# Altium PCB PCB1.PcbDoc
Units mm, origin at the board's own origin, x right, y up, seen from the top; angles counter-clockwise.
Board outline 74.68 x 42.27 mm, 2 copper layers (Top Layer, Bottom Layer); 49 components, 66 nets, 219 pads, 47 vias.
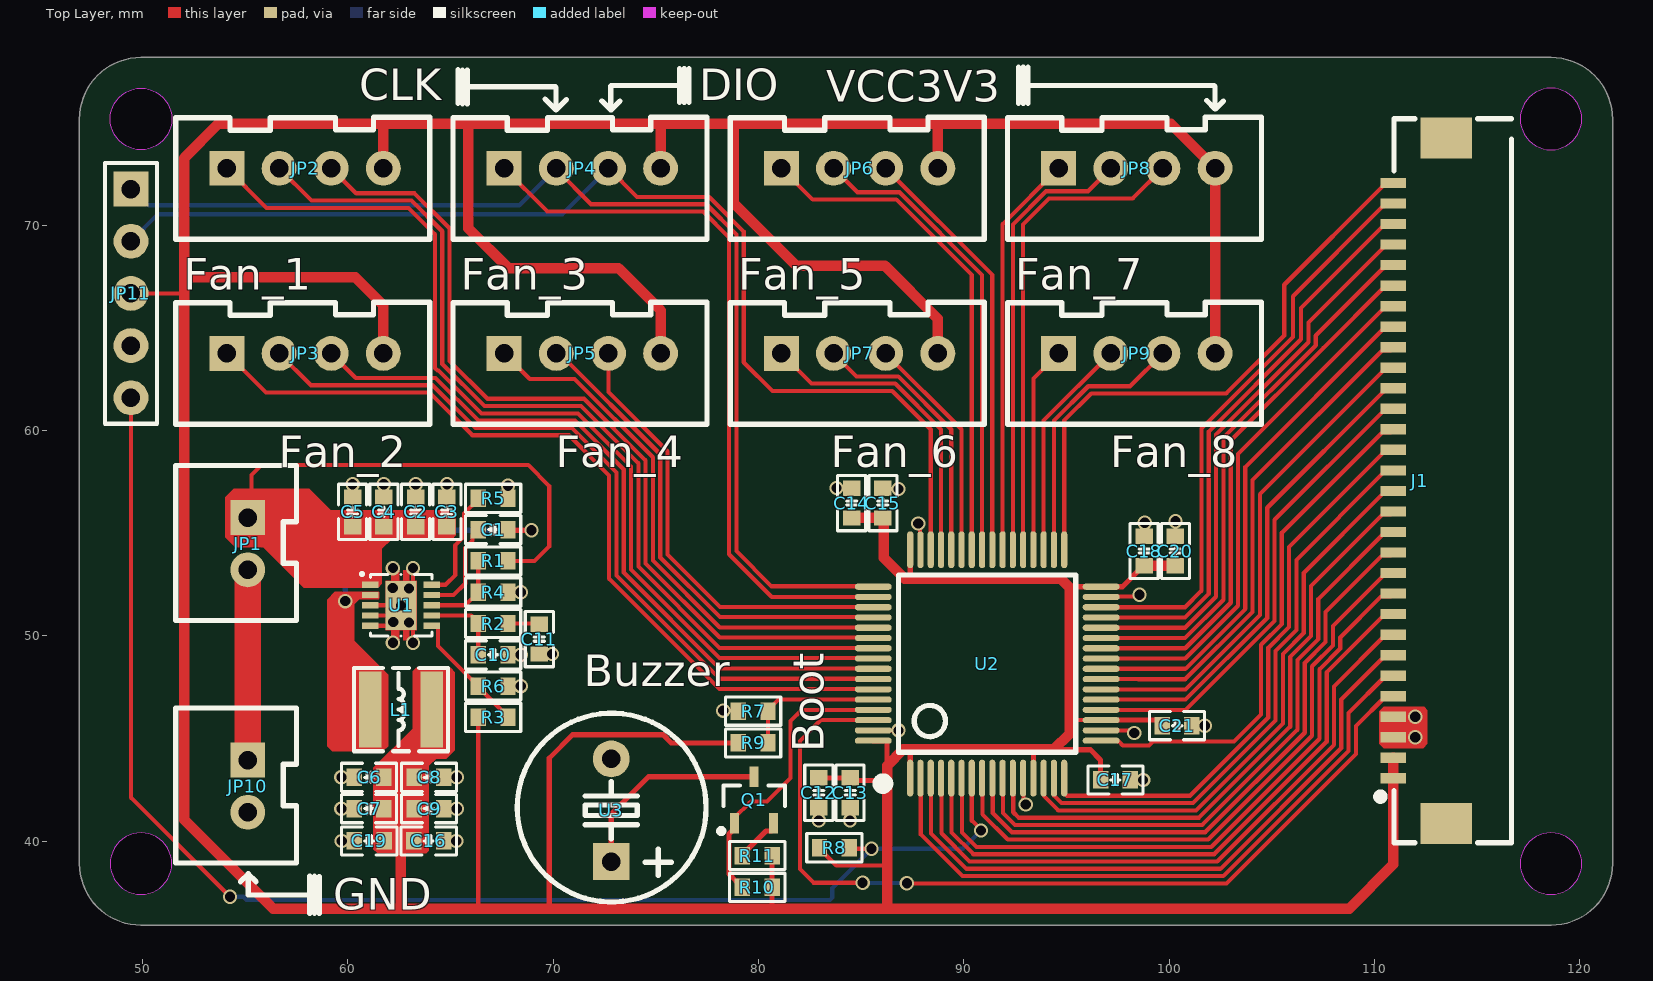
[diagram p0: Top Layer view]
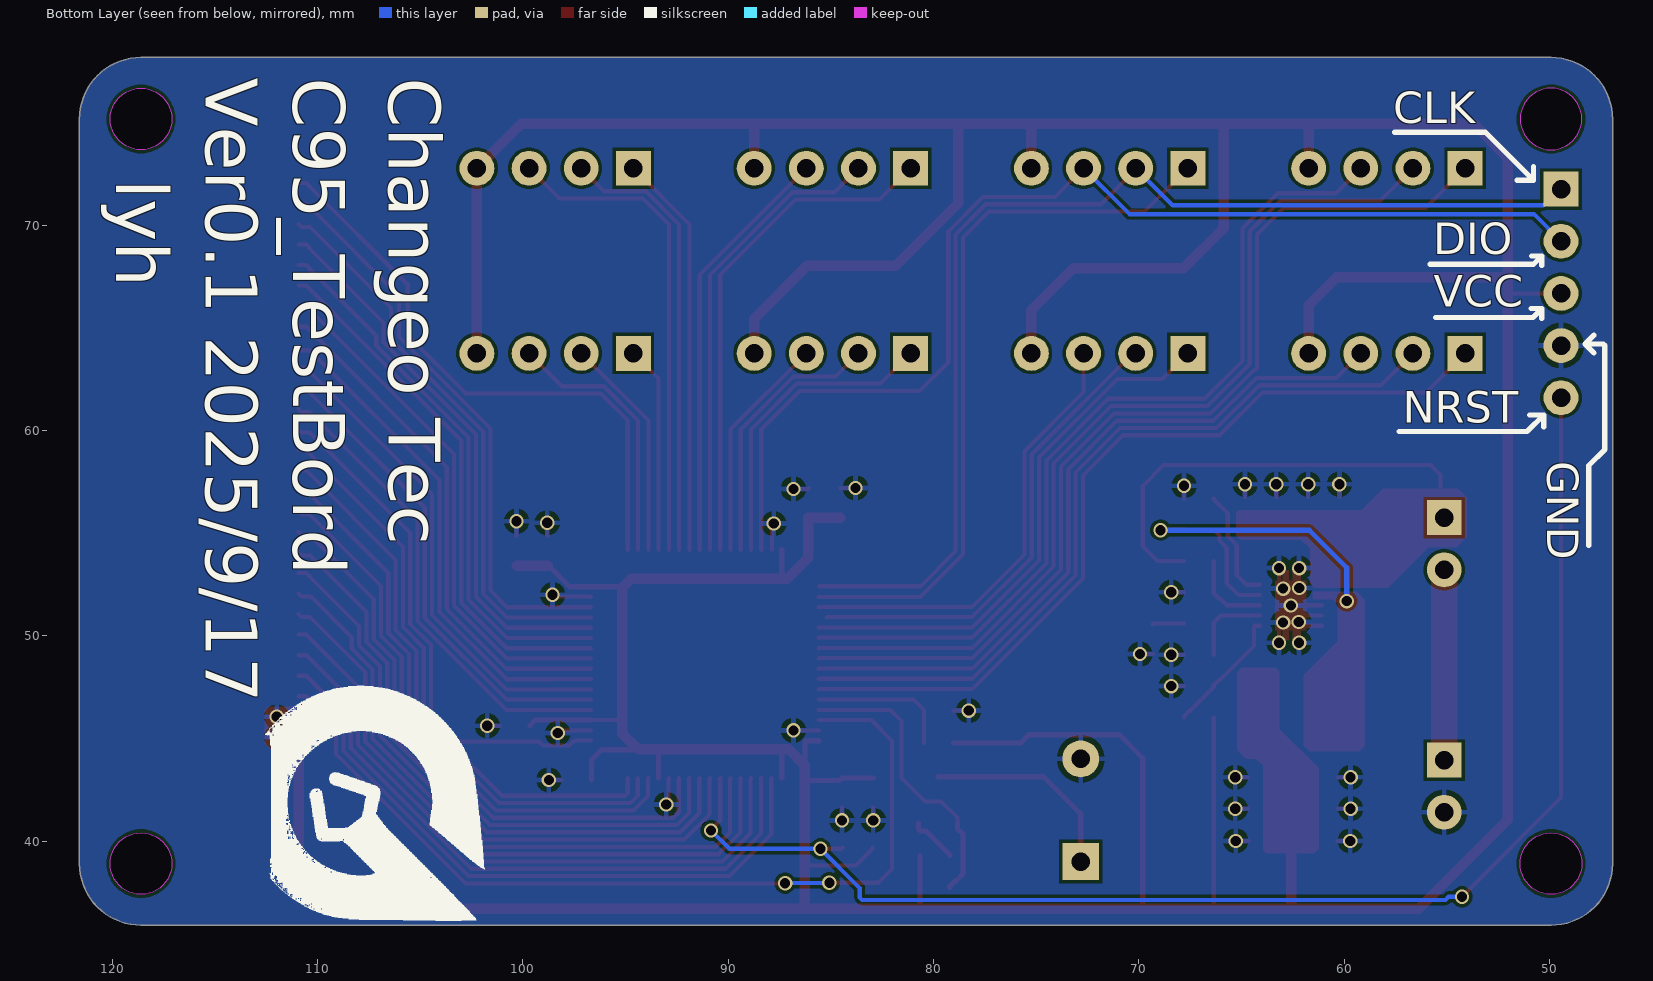
[diagram p1: Bottom Layer view, seen from below]

## Layer stack, top to bottom
Top Solder: solder mask 0.0102, Solder Resist, Dk 3.5
Top Layer: signal copper 0.0356
Dielectric 1: dielectric 0.32, FR-4, Dk 4.8
Bottom Layer: signal copper 0.0356
Bottom Solder: solder mask 0.0102, Solder Resist, Dk 3.5

## Board outline
46.918,38.902 46.918,75.171 cw(c49.918,75.171) 49.918,78.171 118.597,78.171 cw(c118.597,75.171) 121.597,75.171 121.597,38.902 cw(c118.597,38.902) 118.597,35.902 49.918,35.902 cw(c49.918,38.902)
cut-out: 48.418,38.902 ccw(c49.918,38.902) 49.918,37.402 ccw(c49.918,38.902) 51.418,38.902 ccw(c49.918,38.902) 49.918,40.402 ccw(c49.918,38.902)
cut-out: 117.097,38.902 ccw(c118.597,38.902) 118.597,37.402 ccw(c118.597,38.902) 120.097,38.902 ccw(c118.597,38.902) 118.597,40.402 ccw(c118.597,38.902)
cut-out: 117.097,75.171 ccw(c118.597,75.171) 118.597,73.671 ccw(c118.597,75.171) 120.097,75.171 ccw(c118.597,75.171) 118.597,76.671 ccw(c118.597,75.171)
cut-out: 49.918,73.671 cw(c49.918,75.171) 48.418,75.171 cw(c49.918,75.171) 49.918,76.671 cw(c49.918,75.171) 51.418,75.171 cw(c49.918,75.171)

## Design rules (kind name [scope] priority, off if disabled: settings)
Clearance [All] p1: gap=0.152 ignorepadtopadclearanceinfootprint=FALSE except(0: Arc-Hole Track-Hole SMDPad-Hole THPad-Hole Via-Hole Fill-Hole Poly-Hole Region-Hole Text-Text Text-Hole; 0.254: Via-Via)
PolygonConnect [All] p1: connectstyle=Relief reliefconductorwidth=0.254 reliefentries=4 polygonreliefangle="90 Angle" airgapwidth=0.254
RoutingVias [All] p1: holewidth=0.5 width=0.7 viastyle="Through Hole" minholewidth=0.4 minwidth=0.3 maxholewidth=0.5 maxwidth=1.27
SilkToSilkClearance [All] p1: silktosilkclearance=0
SilkToSolderMaskClearance [IsPad] p1: minsilkscreentomaskgap=0 clearancetoexposedcopper=TRUE
SolderMaskExpansion [All] p1: expansion=0.102 istentingtop=FALSE
Width [All] p1: maxlimit=2.54 minlimit=0.203 preferedwidth=0.254
28 further rules are at their usual default settings.

## Classes and differential pairs
component class PWR: C1 C2 C3 C4 C5 C6 C7 C8 C9 C10 C11 L1 R1 R2 R3 R4 R5 R6 U1
component class mcu: C12 C13 C14 C15 C16 C17 C18 C19 C20 C21 JP11 Q1 R7 R8 R9 R10 R11 U2 U3
component class Connector: J1 JP1 JP2 JP3 JP4 JP5 JP6 JP7 JP8 JP9 JP10

## Components (designator, comment, footprint, x,y, rotation, side; value= is the part's Value field where it differs from the comment)
C1 "100nF/25V" C0603_L 67.068,55.169 r180 top
C2 "10uF/25V" C0603_L 63.297,56.032 r270 top
C3 "10uF/25V" C0603_L 64.821,56.032 r270 top
C4 "1uF/25V" C0603_L 61.747,56.032 r270 top
C5 "3.3nF/25V" C0603_L 60.223,56.032 r270 top
C6 "22uF/16V" C0603_L 61.025,43.104 r0 top
C7 "22uF/16V" C0603_L 61.025,41.58 r0 top
C8 "22uF/16V" C0603_L 63.946,43.104 r180 top
C9 "22uF/16V" C0603_L 63.946,41.58 r180 top
C10 "120pF/25V" C0603_L 67.068,49.073 r180 top
C11 "6.8nF/25V" C0603_L 69.317,49.835 r90 top
C12 "1uF/10V" C0603_L 82.931,42.353 r270 top
C13 "1uF/10V" C0603_L 84.455,42.353 r270 top
C14 "1uF/10V" C0603_L 84.531,56.464 r270 top
C15 "1uF/10V" C0603_L 86.055,56.464 r270 top
C16 "1uF/10V" C0603_L 63.932,40.005 r180 top
C17 "10nF/10V" C0603_L 97.384,42.977 r180 top
C18 "1uF/10V" C0603_L 98.781,54.127 r270 top
C19 "1uF/10V" C0603_L 61.036,40.005 r180 top
C20 "1uF/10V" C0603_L 100.305,54.127 r270 top
C21 "10nF/10V" C0603_L 100.381,45.618 r0 top
J1 "Header 30X1" FPC1.0-2H-WS-30P 113.457,57.555 r90 top
JP1 "HDR-1X2" XH2.54-LI-2P 55.118,54.483 r270 top
JP2 "HDR-1X4" XH2.54-LI-4P 57.912,72.771 r0 top
JP3 "HDR-1X4" XH2.54-LI-4P 57.912,63.754 r0 top
JP4 "HDR-1X4" XH2.54-LI-4P 71.416,72.771 r0 top
JP5 "HDR-1X4" XH2.54-LI-4P 71.416,63.754 r0 top
JP6 "HDR-1X4" XH2.54-LI-4P 84.921,72.771 r0 top
JP7 "HDR-1X4" XH2.54-LI-4P 84.921,63.754 r0 top
JP8 "HDR-1X4" XH2.54-LI-4P 98.425,72.771 r0 top
JP9 "HDR-1X4" XH2.54-LI-4P 98.425,63.754 r0 top
JP10 "HDR-1X2" XH2.54-LI-2P 55.118,42.672 r270 top
JP11 "HDR-1X5" HDR2.54-LI-5P 49.428,66.675 r270 top
L1 "5.6uH" NR4020 62.586,46.406 r0 top
Q1 "AO3401" SOT23-3L 79.781,42.012 r0 top
R1 "10K 1%" R0603_L 67.068,53.645 r180 top
R2 "4.42K 1%" R0603_L 67.068,50.597 r0 top
R3 "100K 1%" R0603_L 67.068,46.025 r0 top
R4 "10K 1%" R0603_L 67.068,52.121 r0 top
R5 "95.3K 1%" R0603_L 67.068,56.693 r0 top
R6 "32K 1%" R0603_L 67.068,47.549 r0 top
R7 "10K 1%" R0603_L 79.731,46.33 r180 top
R8 "10K 1%" R0603_L 83.693,39.675 r180 top
R9 "10K 1%" R0603_L 79.731,44.78 r180 top
R10 "10K 1%" R0603_L 79.934,37.744 r0 top
R11 "0R 1%" R0603_L 79.934,39.294 r0 top
U1 "TPS54335A-QFN" VSON-10_L3.0-W3.0-P0.50-TL-EP 62.586,51.486 r0 top
U2 "STM32F103R6TX_LQFP64" "LQFP64 10x10_N" 91.135,48.641 r0 top locked
U3 "Buzzer-A" "BEEP 5x9x5.5" 72.822,41.504 r0 top

## Footprints (in the part's own frame and the unit in brackets; to place one, negate y for a bottom-side part, rotate by r counter-clockwise, add the part's x,y. Pads: shape width x height; smd on the part's side, far side on the other; paste and mask are expansions set on the pad)
"BEEP 5x9x5.5" [mm] "5*9*5.5mm(脚距,直径,高度)"
  rect 1.8x1.8 hole 0.9: 1(0,-2.5)
  round 1.8 hole 0.9: 2(0,2.5)
  silkscreen extent -4.58,-4.47 4.62,4.72, body extent -4.5,-4.5 4.5,4.5, height 5.45
C0603_L [mm] "贴片MLCC电容"
  rect 0.75x0.85 smd: 1(-0.725,0) 2(0.725,0)
  silkscreen extent -1.35,-0.69 1.35,0.69, body extent -0.8,-0.4 0.8,0.4, height 0.8
FPC1.0-2H-WS-30P [mm] "翻盖FPC，脚距1mm，不含脚（长34.9mm，宽5.2mm，高1.96mm）"
  rect 2x2.5 smd: 0(-16.69,-0.04) 0(16.69,-0.04)
  rect 0.5x1.25 smd: 1(-14.5,2.535) 2(-13.5,2.535) 3(-12.5,2.535) 4(-11.5,2.535) 5(-10.5,2.535) 6(-9.5,2.535) 7(-8.5,2.535) 8(-7.5,2.535) 9(-6.5,2.535) 10(-5.5,2.535) 11(-4.5,2.535) 12(-3.5,2.535) 13(-2.5,2.535) 14(-1.5,2.535) 15(-0.5,2.535) 16(0.5,2.535) 17(1.5,2.535) 18(2.5,2.535) 19(3.5,2.535) 20(4.5,2.535) 21(5.5,2.535) 22(6.5,2.535) 23(7.5,2.535) 24(8.5,2.535) 25(9.5,2.535) 26(10.5,2.535) 27(11.5,2.535) 28(12.5,2.535) 29(13.5,2.535) 30(14.5,2.535)
  silkscreen extent -17.64,-3.21 17.63,3.27, body extent -17.45,-3.19 17.45,2.81, height 2
HDR2.54-LI-5P [mm] "排针，5脚"
  rect 1.7x1.7 hole 0.9: 1(-5.08,0)
  round 1.7 hole 0.9: 2(-2.54,0) 3(0,0) 4(2.54,0) 5(5.08,0)
  silkscreen extent -6.35,-1.27 6.35,1.27, body extent -6.35,-1.27 6.35,1.27, height 8.5
"LQFP64 10x10_N" [mm] "64脚，体宽10x10mm，脚距0.5mm"
  oval 0.3x1.8 smd: 1(-3.75,-5.575) 2(-3.25,-5.575) 3(-2.75,-5.575) 4(-2.25,-5.575) 5(-1.75,-5.575) 6(-1.25,-5.575) 7(-0.75,-5.575) 8(-0.25,-5.575) 9(0.25,-5.575) 10(0.75,-5.575) 11(1.25,-5.575) 12(1.75,-5.575) 13(2.25,-5.575) 14(2.75,-5.575) 15(3.25,-5.575) 16(3.75,-5.575) 33(3.75,5.55) 34(3.25,5.55) 35(2.75,5.55) 36(2.25,5.55) 37(1.75,5.55) 38(1.25,5.55) 39(0.75,5.55) 40(0.25,5.55) 41(-0.25,5.55) 42(-0.75,5.55) 43(-1.25,5.55) 44(-1.75,5.55) 45(-2.25,5.55) 46(-2.75,5.55) 47(-3.25,5.55) 48(-3.75,5.55)
  oval 1.8x0.3 smd: 17(5.55,-3.75) 18(5.55,-3.25) 19(5.55,-2.75) 20(5.55,-2.25) 21(5.55,-1.75) 22(5.55,-1.25) 23(5.55,-0.75) 24(5.55,-0.25) 25(5.55,0.25) 26(5.55,0.75) 27(5.55,1.25) 28(5.55,1.75) 29(5.55,2.25) 30(5.55,2.75) 31(5.55,3.25) 32(5.55,3.75) 49(-5.55,3.75) 50(-5.55,3.25) 51(-5.55,2.75) 52(-5.55,2.25) 53(-5.55,1.75) 54(-5.55,1.25) 55(-5.55,0.75) 56(-5.55,0.25) 57(-5.55,-0.25) 58(-5.55,-0.75) 59(-5.55,-1.25) 60(-5.55,-1.75) 61(-5.55,-2.25) 62(-5.55,-2.75) 63(-5.55,-3.25) 64(-5.55,-3.75)
  silkscreen extent -5.33,-6.09 4.32,4.32, body extent -6,-6 6,6, height 1.45
NR4020 [mm] "4.0mm*4.0mm*2.0mm(长*宽*高）"
  rect 1.1x3.7 smd: 1(-1.5,0) 2(1.5,0)
  silkscreen extent -2.29,-2.03 2.29,2.03, body extent -2,-2 2,2, height 2.1
R0603_L [mm] "1/10W贴片电阻"
  rect 0.75x0.85 smd: 1(-0.725,0) 2(0.725,0)
  silkscreen extent -1.35,-0.69 1.35,0.69, body extent -0.8,-0.4 0.8,0.4, height 0.4
SOT23-3L [mm] "3x1.3x1mm(长宽高)"
  rect 0.45x1 smd: 1(-0.95,-1.143) 2(0.95,-1.143) 3(0,1.125)
  silkscreen extent -1.72,-1.65 1.5,0.7, body extent -1.5,-1.2 1.5,1.2, height 1.05
VSON-10_L3.0-W3.0-P0.50-TL-EP [mm]
  rect 0.8x0.3 smd: 1(-1.5,1) 2(-1.5,0.5) 3(-1.5,0) 4(-1.5,-0.5) 5(-1.5,-1) 6(1.5,-1) 7(1.5,-0.5) 8(1.5,0) 9(1.5,0.5) 10(1.5,1)
  rect 1.52x2.4 smd: 11(0.002,-0.009)
  Top Layer region: -0.758,1.191 -0.398,1.191 -0.398,1.706 -0.098,1.706 -0.098,1.191 0.102,1.191 0.102,1.706 0.402,1.706 0.402,1.191 0.761,1.191 0.761,-1.209 0.402,-1.209 0.402,-1.714 0.102,-1.714 0.102,-1.209 -0.098,-1.209 -0.098,-1.714 -0.398,-1.714 -0.398,-1.209 -0.759,-1.209 -0.759,0.886 -0.758,0.886 -0.758,1.191
  silkscreen extent -1.98,-1.5 1.5,1.6, body extent -1.51,-1.52 1.51,1.5, height 0.61
XH2.54-LI-2P [mm] "接插件，2P"
  rect 1.7x1.7 hole 0.9: 1(-1.27,0)
  round 1.7 hole 0.9: 2(1.27,0)
  silkscreen extent -3.81,-3.51 3.74,2.37, body extent -3.77,-3.3 3.77,2.4, height 7.05
XH2.54-LI-4P [mm] "接插件，4P"
  rect 1.7x1.7 hole 0.9: 1(-3.81,0)
  round 1.7 hole 0.9: 2(-1.27,0) 3(1.27,0) 4(3.81,0)
  silkscreen extent -6.3,-3.45 6.07,2.49, body extent -6.31,-3.3 6.31,2.4, height 7.03

## Part data
C1 C2 C3 C4 C5 C6 C7 C8 C9 C10 C11 C12 C13 C14 C15 C16 C17 C18 C19 C20 C21: library part C, "无极性贴片电容", BOM名称=无极性贴片电容, 学习资源=www.ooocke.com, 材质=X7R, 版权归属=源创客
JP1 JP10: library part "Header 2", "2P接插件", BOM名称=2P接插件, 学习资源=www.ooocke.com, 版权归属=源创客
JP2 JP3 JP4 JP5 JP6 JP7 JP8 JP9: library part "Header 4", "4P接插件", BOM名称=4P接插件, 学习资源=www.ooocke.com, 版权归属=源创客
JP11: library part "Header 5", "5P接插件", BOM名称=5P接插件, 学习资源=www.ooocke.com, 版权归属=源创客
L1: library part L, "小功率贴片电感", BOM名称=小功率贴片电感, 学习资源=www.ooocke.com, 版权归属=源创客
Q1: "P沟道 30V/4.2A", BOM名称=场效应管, 学习资源=www.ooocke.com, 描述="P沟道 30V/4.2A", 版权归属=源创客
R1 R2 R3 R4 R5 R6 R7 R8 R9 R10 R11: library part R, "贴片电阻", BOM名称=贴片电阻, 学习资源=www.ooocke.com, 版权归属=源创客
U1: "BUCK"
U3: "有源蜂鸣器"

## Via types
v1: diameter 0.7, hole 0.5, Top Layer to Bottom Layer, 47 vias

## Nets (pads, with @x,y where several pads share a name; then routed paths per layer and width w, separated by ;. In a path a pad name is that pad's centre, name@x,y a point inside that pad or via, vN(x,y) a via of type N, cw(c..) or ccw(c..) an arc to the next point about the centre after c; other vN are vias at no path point)
BEEP: Q1.1 R10.1 U2.61 | length 14.4
  Top Layer w0.203: Q1.1 78.831,41.144 79.572,41.885 79.578,41.885 79.629,41.935 80.416,41.935 81.559,43.078 81.559,45.847 82.103,46.391 U2.61
  Top Layer w0.254: Q1.1 78.831,40.594 78.733,40.496 78.703,40.496 78.554,40.347 78.554,38.399 78.911,38.042 78.961,38.042 79.209,37.794 R10.1
BOOT: R7.1 R9.1 U2.60 | length 6.9
  Top Layer w0.203: R9.1 R7.1 80.456,46.38 80.967,46.891 U2.60
Button: J1.6 U2.2 | length 31.7
  Top Layer w0.203: U2.2 87.902,43.049 87.902,40.317 89.925,38.294 102.637,38.294 108.737,44.394 108.737,46.246 110.547,48.055 J1.6
GND: C2.1 C3.1 C4.1 C5.1 C6.1 C7.1 C8.1 C9.1 C10.1 C11.1 C12.2 C13.2 C14.1 C15.1 C16.1 C17.1 C18.1 C19.2 C20.1 C21.2 J1.3 J1.4 JP10.2 JP11.4 R4.2 R5.2 R6.2 R7.2 U1.3 U1.4 U1.5 U1.11 U2.12 U2.18 U2.31 U2.47 U2.63 U3.2 | length 29.4
  Top Layer w0.203: v1(59.678,41.58) C7.1 ; v1(59.678,43.104) C6.1 ; v1(59.69,40.005) C19.2 ; C5.1 v1(60.223,57.379) ; U1.5 62.347,50.486 U1.11@62.382,50.521 ; U1.4 62.298,50.986 U1.11@62.306,50.978 ; U1.3 62.51,51.486 U1.11@62.535,51.46 ; C4.1 v1(61.747,57.379) ; v1(62.187,49.656) U1.11@62.187,50.277 ; U1.11@62.187,52.677 v1(62.187,53.298) ; v1(63.167,49.656) U1.11@63.167,50.277 ; U1.11@63.167,52.677 v1(63.167,53.298) ; C2.1 v1(63.297,57.379) ; C16.1 v1(65.278,40.005) ; C9.1 v1(65.292,41.58) ; C8.1 v1(65.292,43.104) ; C3.1 v1(64.821,57.379) ; R6.2 v1(68.414,47.549) ; C10.1 v1(68.414,49.073) ; R4.2 v1(68.414,52.121) ; R5.2 v1(67.793,57.314) ; C11.1 v1(69.938,49.11) ; v1(78.283,46.355) 78.98,46.355 R7.2 ; v1(82.931,41.007) C12.2 ; v1(83.795,57.201) 84.52,57.201 C14.1 ; v1(84.455,41.007) C13.2 ; U2.63 v1(86.817,45.39) ; C15.1 86.094,57.15 v1(86.817,57.15) ; v1(87.771,55.467) 87.771,55.333 87.867,55.237 87.867,54.21 U2.47 ; U2.12 92.904,43.047 92.904,42.022 93.008,41.918 v1(93.008,41.783) ; U2.18 98.034,45.391 98.164,45.262 v1(98.298,45.262) ; U2.31 96.704,51.91 98.467,51.91 v1(98.552,51.995) ; C17.1 v1(98.73,42.977) ; C18.1 98.806,54.878 v1(98.806,55.499) ; C20.1 v1(100.305,55.575) ; C21.2 v1(101.727,45.618)
  other v1: 111.989,45.06 111.989,46.05 62.967,50.648 62.205,50.673 62.587,51.477 62.967,52.299 62.179,52.324
NetC1_1: C1.1 L1.1 U1.2 | length 13.9
  Top Layer w0.254: v1(59.868,51.689) 59.998,51.689 60.294,51.986 U1.2 ; C1.1 67.818,55.143 v1(68.936,55.143)
  Bottom Layer w0.254: v1(59.868,51.689) 59.868,53.315 61.697,55.143 v1(68.936,55.143)
NetC1_2: C1.2 U1.9 | length 4.7
  Top Layer w0.203: U1.9 65.143,51.986 65.71,52.553 65.71,54.275 66.069,54.634 66.069,54.895 C1.2
NetC10_2: C10.2 R2.1 U1.7 | length 4
  Top Layer w0.203: U1.7 66.004,50.986 66.343,50.647 R2.1 C10.2
NetC11_2: C11.2 R2.2 | length 1.5
  Top Layer w0.203: R2.2 69.28,50.597 C11.2
NetQ1_2: Q1.2 R11.1 | length 2.4
  Top Layer w0.254: R11.1 79.209,39.344 80.361,40.496 80.633,40.496 80.731,40.594 Q1.2
NetQ1_3: Q1.3 U3.1 | length 10
  Top Layer w0.254: U3.1 72.822,41.326 74.633,43.137 Q1.3
NetR1_2: R1.2 R4.1 U1.8 | length 4.1
  Top Layer w0.203: U1.8 65.707,51.486 66.019,51.797 66.069,51.797 66.343,52.071 R4.1 R1.2
NetR5_1: R5.1 U1.10 | length 5.5
  Top Layer w0.203: U1.10 64.754,52.486 65.227,52.959 65.227,54.413 65.659,54.845 65.659,55.959 66.343,56.643 R5.1
NRST: JP11.5 R8.1 U2.7 | length 68.5
  Top Layer w0.203: JP11.5 49.428,42.113 v1(54.254,37.287) ; R8.1 84.469,39.624 v1(85.502,39.624) ; U2.7@90.404,43.047 U2.7 90.385,40.994 90.83,40.549 v1(90.83,40.513)
  Bottom Layer w0.203: v1(54.254,37.287) 54.911,37.287 55.064,37.135 83.472,37.135 83.591,37.254 83.591,37.713 v1(85.502,39.624) 89.941,39.624 v1(90.83,40.513)
Part1_LED_U: J1.7 U2.3 | length 31.6
  Top Layer w0.203: U2.3 88.404,43.047 88.404,40.374 90.129,38.649 102.49,38.649 108.382,44.541 108.382,46.89 110.547,49.055 J1.7
Part1_LED_V: J1.8 U2.4 | length 31.5
  Top Layer w0.203: U2.4 88.904,43.047 88.904,40.382 90.281,39.005 102.343,39.005 108.026,44.689 108.026,47.534 110.547,50.055 J1.8
Part1_LED_W: J1.9 U2.5 | length 31.4
  Top Layer w0.203: U2.5 89.404,43.047 89.404,40.416 90.459,39.361 102.195,39.361 107.671,44.836 107.671,48.219 110.358,50.907 110.773,50.907 J1.9
Part1_U: JP2.1 U2.56 | length 48.1
  Top Layer w0.203: JP2.1 56.032,70.841 62.951,70.841 64.237,69.555 64.237,63.035 64.356,62.916 64.414,62.916 66.497,60.833 71.206,60.833 73.787,58.252 73.787,53.223 78.101,48.91 85.567,48.91 U2.56
Part1_V: JP2.2 U2.55 | length 45.4
  Top Layer w0.203: JP2.2 58.217,71.196 63.099,71.196 64.592,69.703 64.592,63.241 66.644,61.189 71.354,61.189 74.143,58.4 74.143,53.37 78.103,49.41 85.567,49.41 U2.55
Part1_W: JP2.3 U2.54 | length 42.6
  Top Layer w0.203: JP2.3 60.401,71.552 63.246,71.552 64.948,69.85 64.948,63.388 66.792,61.544 71.501,61.544 74.498,58.547 74.498,53.518 78.106,49.91 85.567,49.91 U2.54
Part2_LED_U: J1.10 U2.6 | length 31.4
  Top Layer w0.203: U2.6 89.904,43.047 89.904,40.424 90.611,39.716 102.048,39.716 107.315,44.983 107.315,48.367 108.331,49.383 108.331,49.911 110.327,51.907 110.773,51.907 J1.10
Part2_LED_V: J1.11 U2.8 | length 30.2
  Top Layer w0.203: U2.8 90.904,43.047 90.904,41.303 92.135,40.072 101.901,40.072 106.959,45.131 106.959,48.514 107.975,49.53 107.975,50.47 110.398,52.893 110.398,52.907 110.547,53.055 J1.11
Part2_LED_W: J1.12 U2.9 | length 30.1
  Top Layer w0.203: U2.9 91.404,43.047 91.404,41.362 92.338,40.427 101.753,40.427 106.604,45.278 106.604,48.677 107.62,49.693 107.62,51.156 110.371,53.907 110.773,53.907 J1.12
Part2_U: JP3.1 U2.59 | length 41.2
  Top Layer w0.203: JP3.1 56.007,61.849 63.973,61.849 66.055,59.766 70.764,59.766 72.72,57.81 72.72,52.781 78.092,47.41 85.567,47.41 U2.59
Part2_V: JP3.2 U2.58 | length 38.5
  Top Layer w0.203: JP3.2 58.191,62.205 64.12,62.205 66.203,60.122 70.912,60.122 73.076,57.958 73.076,52.928 78.095,47.91 85.567,47.91 U2.58
Part2_W: JP3.3 U2.57 | length 35.7
  Top Layer w0.203: JP3.3 60.376,62.56 64.267,62.56 66.35,60.477 71.059,60.477 73.431,58.105 73.431,53.076 78.098,48.41 85.567,48.41 U2.57
Part3_LED_U: J1.13 U2.10 | length 30
  Top Layer w0.203: U2.10 91.904,43.047 91.904,41.37 92.491,40.783 101.606,40.783 106.248,45.425 106.248,48.824 107.264,49.84 107.264,51.791 110.38,54.907 110.773,54.907 J1.13
Part3_LED_V: J1.14 U2.11 | length 29.9
  Top Layer w0.203: U2.11 92.404,43.047 92.404,41.403 92.669,41.139 101.459,41.139 105.893,45.572 105.893,48.971 106.909,49.987 106.909,52.426 110.39,55.907 110.773,55.907 J1.14
Part3_LED_W: J1.15 U2.14 | length 28.3
  Top Layer w0.203: U2.14 93.904,43.047 93.904,42.189 94.599,41.494 101.312,41.494 105.537,45.72 105.537,49.119 106.553,50.135 106.553,53.061 110.398,56.906 110.547,57.055 J1.15
Part3_U: JP4.1 U2.50 | length 35.7
  Top Layer w0.203: JP4.1 69.715,70.663 77.302,70.663 78.562,69.403 78.562,53.97 80.641,51.891 U2.50
Part3_V: JP4.2 JP11.1 U2.49 | length 54.7
  Top Layer w0.203: JP4.2 70.146,72.708 71.836,71.018 77.45,71.018 78.918,69.55 78.918,54.127 80.636,52.41 U2.49@85.567,52.41
  Bottom Layer w0.203: JP11.1 50.177,71.007 50.257,71.007 50.296,70.968 68.343,70.968 JP4.2
Part3_W: JP4.3 JP11.2 U2.46 | length 55.3
  Top Layer w0.203: JP4.3 74.083,71.374 77.597,71.374 79.273,69.698 79.273,63.322 80.67,61.925 86.511,61.925 88.385,60.051 U2.46
  Bottom Layer w0.203: JP11.2 50.749,70.536 70.451,70.536 JP4.3
Part4_LED_U: J1.16 U2.15 | length 28.2
  Top Layer w0.203: U2.15 94.404,43.047 94.404,42.203 94.756,41.85 101.164,41.85 105.181,45.867 105.181,49.266 106.197,50.282 106.197,53.696 110.398,57.897 110.398,57.907 110.547,58.055 J1.16
Part4_LED_V: J1.17 U2.16 | length 28.1
  Top Layer w0.203: U2.16 94.885,42.342 95.022,42.205 101.017,42.205 104.826,46.014 104.826,49.413 105.842,50.429 105.842,54.331 110.398,58.887 110.398,58.907 110.547,59.055 J1.17
Part4_LED_W: J1.18 U2.17 | length 25.3
  Top Layer w0.203: U2.17 97.461,44.891 97.51,44.843 97.552,44.843 97.737,44.658 99.014,44.658 99.202,44.846 103.155,44.846 104.47,46.162 104.47,49.561 105.486,50.577 105.486,55.016 110.376,59.907 110.773,59.907 J1.18
Part4_U: JP5.1 U2.53 | length 26.5
  Top Layer w0.203: JP5.1 68.851,62.509 71.039,62.509 74.854,58.694 74.854,53.665 78.109,50.41 85.567,50.41 U2.53
Part4_V: JP5.2 U2.52 | length 23.3
  Top Layer w0.203: JP5.2 70.297,63.754 75.209,58.841 75.209,53.812 78.112,50.91 85.179,50.91 U2.52@85.197,50.891
Part4_W: JP5.3 U2.51 | length 22.1
  Top Layer w0.203: JP5.3 72.686,61.867 75.565,58.989 75.565,53.96 78.115,51.41 85.567,51.41 U2.51
Part5_LED_U: J1.19 U2.20 | length 23.2
  Top Layer w0.203: U2.20 100.798,46.391 105.131,50.724 105.131,55.651 110.386,60.907 110.773,60.907 J1.19
Part5_LED_V: J1.20 U2.21 | length 23.7
  Top Layer w0.203: U2.21 100.795,46.891 104.775,50.871 104.775,56.236 110.398,61.859 110.398,61.907 110.547,62.055 J1.20
Part5_LED_W: J1.21 U2.22 | length 24.2
  Top Layer w0.203: U2.22 100.792,47.391 104.419,51.018 104.419,56.896 110.398,62.875 110.398,62.907 110.547,63.055 J1.21
Part5_U: JP6.1 U2.42 | length 24.8
  Top Layer w0.203: JP6.1 82.635,71.247 86.709,71.247 90.385,67.571 U2.42
Part5_V: JP6.2 U2.41 | length 22.8
  Top Layer w0.203: JP6.2 84.819,71.603 86.856,71.603 90.885,67.574 U2.41
Part5_W: JP6.3 U2.40 | length 20.7
  Top Layer w0.203: JP6.3 91.385,67.576 U2.40
Part6_LED_U: J1.22 U2.23 | length 24.7
  Top Layer w0.203: U2.23 98.501,47.891 98.506,47.886 100.784,47.886 104.064,51.166 104.064,57.582 110.389,63.907 110.773,63.907 J1.22
Part6_LED_V: J1.23 U2.24 | length 25.2
  Top Layer w0.203: U2.24 100.786,48.391 103.708,51.313 103.708,58.216 110.547,65.055 J1.23
Part6_LED_W: J1.24 U2.25 | length 25.7
  Top Layer w0.203: U2.25 100.783,48.891 103.353,51.46 103.353,58.852 110.398,65.898 110.398,65.907 110.547,66.055 J1.24
Part6_U: JP7.1 U2.45 | length 15.2
  Top Layer w0.203: JP7.1 82.584,62.281 86.658,62.281 88.885,60.054 U2.45
Part6_V: JP7.2 U2.44 | length 13.1
  Top Layer w0.203: JP7.2 84.768,62.636 86.805,62.636 89.385,60.057 U2.44
Part6_W: JP7.3 U2.43 | length 11.1
  Top Layer w0.203: JP7.3 89.885,60.059 U2.43
Part7_LED_U: J1.25 U2.26 | length 26.2
  Top Layer w0.203: U2.26 100.78,49.391 102.997,51.608 102.997,59.505 107.493,64.001 110.547,67.055 J1.25
Part7_LED_V: J1.26 U2.27 | length 26.7
  Top Layer w0.203: U2.27 100.778,49.891 102.641,51.755 102.641,59.652 107.137,64.148 107.137,64.618 110.398,67.879 110.398,67.907 110.547,68.055 J1.26
Part7_LED_W: J1.27 U2.28 | length 27.2
  Top Layer w0.203: U2.28 100.775,50.391 102.286,51.902 102.286,59.8 106.782,64.296 106.782,65.253 110.398,68.869 110.398,68.907 110.547,69.055 J1.27
Part7_U: JP8.1 U2.39 | length 19.7
  Top Layer w0.203: U2.39 91.885,70.041 JP8.1
Part7_V: JP8.2 U2.38 | length 21.7
  Top Layer w0.203: U2.38 92.385,70.038 94,71.653 96.037,71.653 JP8.2
Part7_W: JP8.3 U2.37 | length 23.8
  Top Layer w0.203: U2.37 92.885,70.035 94.148,71.298 98.222,71.298 JP8.3
Part8_LED_U: J1.28 U2.29 | length 27.7
  Top Layer w0.203: U2.29 100.772,50.891 101.93,52.049 101.93,59.947 106.426,64.443 106.426,65.964 110.369,69.907 110.773,69.907 J1.28
Part8_LED_V: J1.29 U2.30 | length 28.2
  Top Layer w0.203: U2.30 100.769,51.391 101.575,52.197 101.575,60.094 101.723,60.243 106.035,64.555 106.035,66.538 110.398,70.901 110.398,70.907 110.547,71.055 J1.29
Part8_LED_W: J1.30 U2.33 | length 28.6
  Top Layer w0.203: U2.33 94.885,60.478 96.205,61.798 102.776,61.798 105.603,64.626 105.603,67.097 110.398,71.892 110.398,71.907 110.547,72.055 J1.30
Part8_U: JP9.1 U2.36 | length 10.1
  Top Layer w0.203: U2.36 93.385,62.524 JP9.1
Part8_V: JP9.2 U2.35 | length 10.9
  Top Layer w0.203: U2.35 93.885,60.484 JP9.2
Part8_W: JP9.3 U2.34 | length 13
  Top Layer w0.203: U2.34 94.385,60.481 96.058,62.154 98.095,62.154 JP9.3
Status: J1.5 U2.62 | length 44
  Top Layer w0.203: v1(85.065,37.973) 82.677,37.973 82.017,38.633 82.017,44.882 83.026,45.891 U2.62 ; v1(87.224,37.948) 87.233,37.938 102.784,37.938 109.093,44.247 109.093,45.601 110.547,47.055 J1.5
  Bottom Layer w0.203: v1(85.065,37.973) 85.077,37.96 87.211,37.96 v1(87.224,37.948)
VCC3V3: C6.2 C7.2 C8.2 C9.2 C12.1 C13.1 C14.2 C15.2 C16.2 C17.2 C18.2 C19.1 C20.2 C21.1 J1.1 J1.2 JP2.4 JP3.4 JP4.4 JP5.4 JP6.4 JP7.4 JP8.4 JP9.4 JP11.3 L1.2 R3.1 R8.2 R9.2 R10.2 R11.2 U2.1 U2.13 U2.19 U2.32 U2.48 U2.64 | length 314.2
  Top Layer w0.203: JP11.3 52.019,66.675 ; 66.343,36.703 R3.1 ; 75.246,36.717 75.26,36.703 ; 79.959,36.703 80.049,36.793 ; R8.2 82.968,39.625 83.782,38.811 86.258,38.811 ; JP7.4@88.468,63.678 88.544,63.754 JP7.4 ; 95.148,45.974 95.231,45.891 U2.19
  Top Layer w0.254: 69.647,36.703 69.799,36.855 69.799,44.038 70.944,45.183 75.344,45.183 75.747,44.78 R9.2 ; R10.2 80.659,36.791 80.747,36.703 ; R10.2@80.659,37.832 R11.2 ; C12.1 C13.1 84.589,42.945 86.258,42.945 ; U2.64 86.237,44.891 86.258,44.87 86.258,43.678 ; 87.122,52.781 87.385,53.044 U2.48 ; 87.325,44.475 87.385,44.415 U2.1 ; U2.13 93.394,43.074 93.394,44.448 93.421,44.475 ; 94.386,44.45 96.164,44.45 96.659,43.956 C17.2 ; 95.148,52.349 95.19,52.391 U2.32 97.719,52.391 98.731,53.402 C18.2 ; U2.19 99.408,45.891 99.656,45.643 C21.1
  Top Layer w0.508: JP3.4 61.722,66.091 60.35,67.462 52.019,67.462 ; JP2.4 61.722,74.93 ; 62.56,40.005 62.56,36.703 ; JP5.4 75.226,65.845 73.177,67.894 67.818,67.894 65.862,69.85 65.862,74.93 ; JP4.4 75.226,74.896 75.26,74.93 ; C14.2 C15.2 ; C15.2@86.106,55.739 86.106,53.797 87.122,52.781 94.717,52.781 95.148,52.349 95.148,45.974 95.148,45.237 94.386,44.475 93.421,44.475 87.325,44.475 87.056,44.475 86.258,43.678 86.258,42.945 86.258,38.811 86.258,36.703 ; JP7.4 88.731,65.447 86.157,68.021 81.839,68.021 78.791,71.069 78.791,74.93 ; JP6.4 88.731,74.761 88.9,74.93 ; C18.2 C20.2 ; JP9.4 JP8.4 100.076,74.93 88.9,74.93 ; J1.2 J1.1 110.922,38.862 108.763,36.703 86.258,36.703 ; 52.019,67.462 52.019,66.675 52.019,41.046 56.363,36.703 62.56,36.703 ; 52.019,67.462 52.019,73.273 53.677,74.93 61.722,74.93 ; 61.722,74.93 65.862,74.93 ; 62.56,36.703 66.343,36.703 69.647,36.703 75.26,36.703 79.959,36.703 80.747,36.703 86.258,36.703 ; 65.862,74.93 75.26,74.93 ; 75.26,74.93 78.791,74.93 ; 78.791,74.93 88.9,74.93
VCC12V: C2.2 C3.2 C4.2 C5.2 JP1.1 R1.1 U1.1 | length 22.5
  Top Layer w0.203: JP1.1 55.296,55.931 55.296,57.836 55.778,58.318 68.783,58.318 69.799,57.302 69.799,54.356 69.088,53.645 R1.1
VDC: JP1.2 JP10.1 | length 9.3
  Top Layer w1.27: JP10.1 JP1.2
VSENSE-A: R3.2 R6.1 U1.6 | length 6.2
  Top Layer w0.203: U1.6 64.335,50.486 64.384,50.437 64.384,49.508 66.019,47.872 66.069,47.872 66.343,47.599 66.343,47.499 67.493,46.348 67.519,46.348 67.793,46.075 R3.2
pads on no net: J1.0

## Polygon pours and split planes (outlines as drawn)
GND on Bottom Layer "GND_L02_P000" (solid, pour order 0): 46.918,38.902 46.918,75.171 cw(c49.918,75.171) 49.918,78.171 118.597,78.171 cw(c118.597,75.171) 121.597,75.171 121.597,38.902 cw(c118.597,38.902) 118.597,35.902 49.918,35.902 cw(c49.918,38.902)

## Other copper
Top Layer:
  region net GND: 110.439,46.533 110.236,46.33 110.236,44.729 110.439,44.526 112.37,44.526 112.573,44.729 112.573,46.38 112.42,46.533
  region net VCC12V: 54.432,57.15 54.026,56.744 54.026,54.788 54.508,54.305 55.88,54.305 57.836,52.349 61.468,52.349 61.648,52.53 61.648,54.231 62.103,54.686 65.049,54.686 65.253,54.889 65.253,55.982 65.126,56.109 59.157,56.109 58.115,57.15
  region net VCC3V3: 63.322,48.438 63.144,48.26 63.144,45.466 61.239,43.561 61.239,39.599 61.443,39.395 63.805,39.395 63.932,39.522 63.932,43.663 64.287,44.018 64.795,44.018 65.202,44.425 65.202,48.235 64.999,48.438
  region net NetC1_1: 61.519,51.816 61.493,51.791 60.554,51.791 60.3,51.537 60.3,49.759 61.951,48.108 61.951,44.628 61.697,44.374 59.233,44.374 58.979,44.628 58.979,51.765 59.36,52.146 61.493,52.146 61.519,52.121

## Silkscreen, mask and mechanical layers (free items; w line width, h text height)
Top Overlay:
  lines w0.254: 54.762,38.024 55.143,38.405 55.524,38.024 ; 55.143,38.379 55.143,37.376 58.598,37.376 ; 58.141,36.487 58.141,38.291 ; 58.369,36.487 58.369,38.291 ; 58.598,36.474 58.598,38.278 ; 65.354,75.921 65.354,77.572 ; 65.354,76.746 70.091,76.746 70.129,76.708 70.129,75.616 ; 65.583,75.908 65.583,77.559 ; 65.811,75.908 65.811,77.559 ; 69.596,76.149 70.129,75.616 ; 70.637,76.124 70.129,75.616 ; 72.365,76.048 72.796,75.616 ; 73.254,76.048 72.822,75.616 72.796,75.616 ; 76.149,75.971 76.149,77.622 ; 76.378,75.971 76.378,77.622 ; 76.606,77.622 76.606,75.971 76.606,76.797 76.594,76.81 72.822,76.81 72.796,76.784 72.796,75.616 ; 92.659,75.921 92.659,77.699 ; 92.659,76.81 102.184,76.81 102.235,76.759 102.235,75.667 ; 92.888,75.921 92.888,77.699 ; 93.116,75.921 93.116,77.699 ; 101.829,76.073 102.235,75.667 ; 102.641,76.048 102.26,75.667 102.235,75.667
  text "CLK" at 60.554,76.073 h1.52
  text "DIO" at 77.114,76.073 h1.52
  text "VCC3V3" at 83.287,76.022 h1.52
  text "Fan_1" at 51.994,66.853 h1.52
  text "Fan_3" at 65.498,66.853 h1.52
  text "Fan_5" at 79.002,66.853 h1.52
  text "Fan_7" at 92.507,66.853 h1.52
  text "Fan_2" at 56.617,58.217 h1.52
  text "Fan_4" at 70.121,58.217 h1.52
  text "Fan_6" at 83.519,58.217 h1.52
  text "Fan_8" at 97.13,58.217 h1.52
  text "Buzzer" at 71.476,47.549 h1.52
  text "Boot" at 83.185,44.323 h1.52 r90
  text "GND" at 59.284,36.652 h1.52
Bottom Overlay:
  drawing of 27 lines, arcs and shapes, not listed
  text "Changeo Tec" at 106.521,77.191 h2.54 r90
  text "C95_TestBord" at 111.194,77.191 h2.54 r90
  text "Ver0.1 2025/9/17" at 115.443,77.191 h2.54 r90
  text "CLK" at 57.607,74.955 h1.52
  text "lyh" at 119.804,72.238 h2.54 r90
  text "DIO" at 55.651,68.58 h1.52
  text "VCC" at 55.626,66.015 h1.52
  text "NRST" at 57.15,60.376 h1.52
  text "GND" at 50.089,58.496 h1.52 r90
Mechanical 1:
  circle w0.013: c49.918,75.171 r1.5
  circle w0.013: c118.597,75.171 r1.5
  circle w0.013: c49.918,38.902 r1.5
  circle w0.013: c118.597,38.902 r1.5
  lines w0.013: 46.918,38.902 ccw(c49.918,38.902) 49.918,35.902 118.597,35.902 ccw(c118.597,38.902) 121.597,38.902 121.597,75.171 ccw(c118.597,75.171) 118.597,78.171 49.918,78.171 ccw(c49.918,75.171) 46.918,75.171 46.918,38.902